# Altium PCB PCB4.PcbDoc
Units mm, origin at the board's own origin, x right, y up, seen from the top; angles counter-clockwise.
Board outline 30 x 21.75 mm, 2 copper layers (Top Layer, Bottom Layer); 20 components, 13 nets, 57 pads, 3 vias.
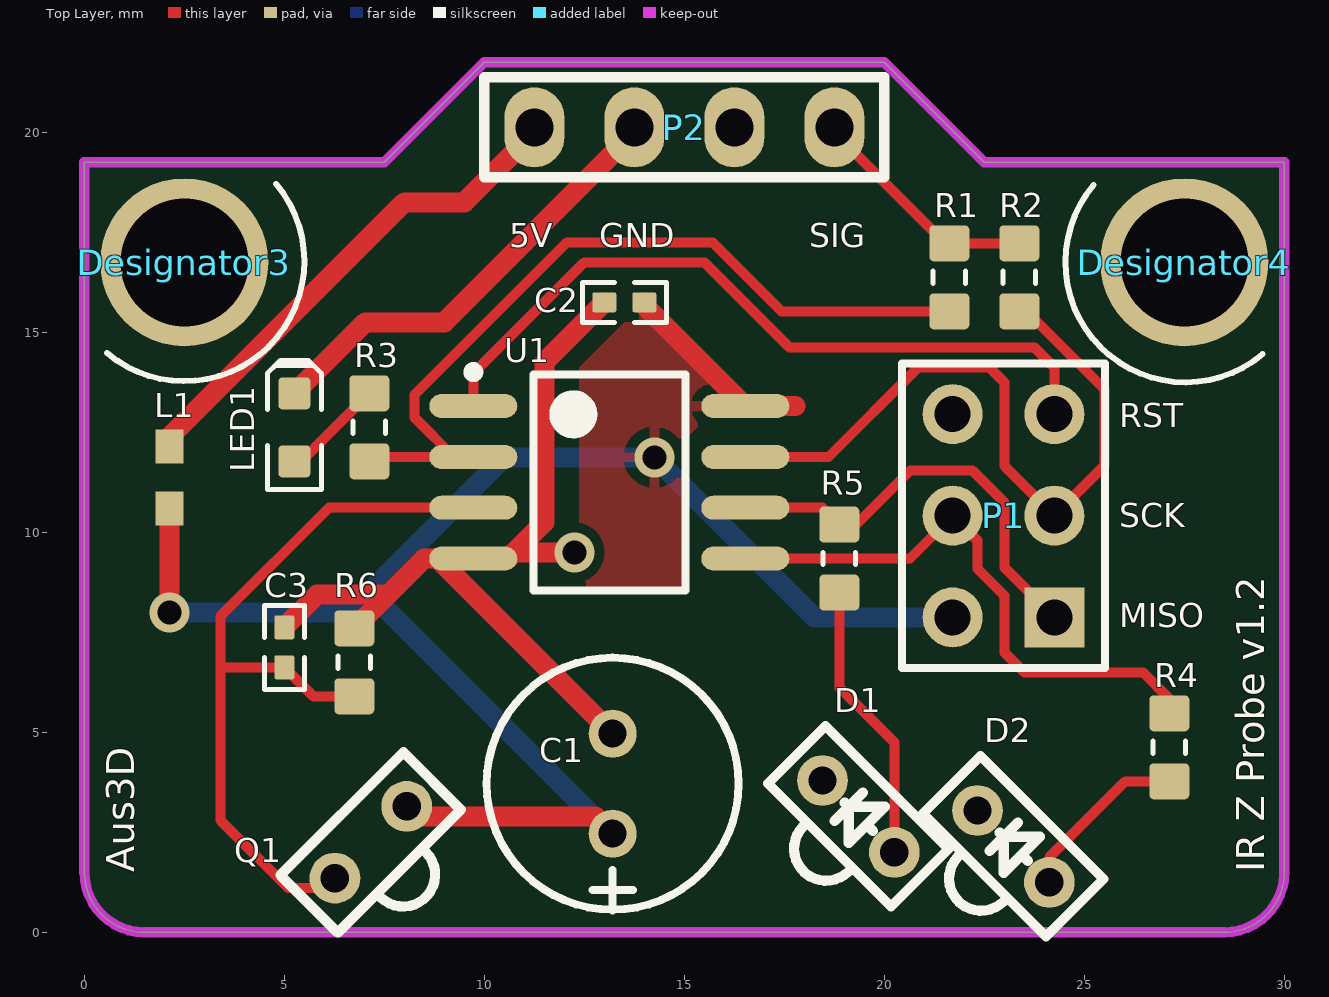
[diagram p0: Top Layer view]
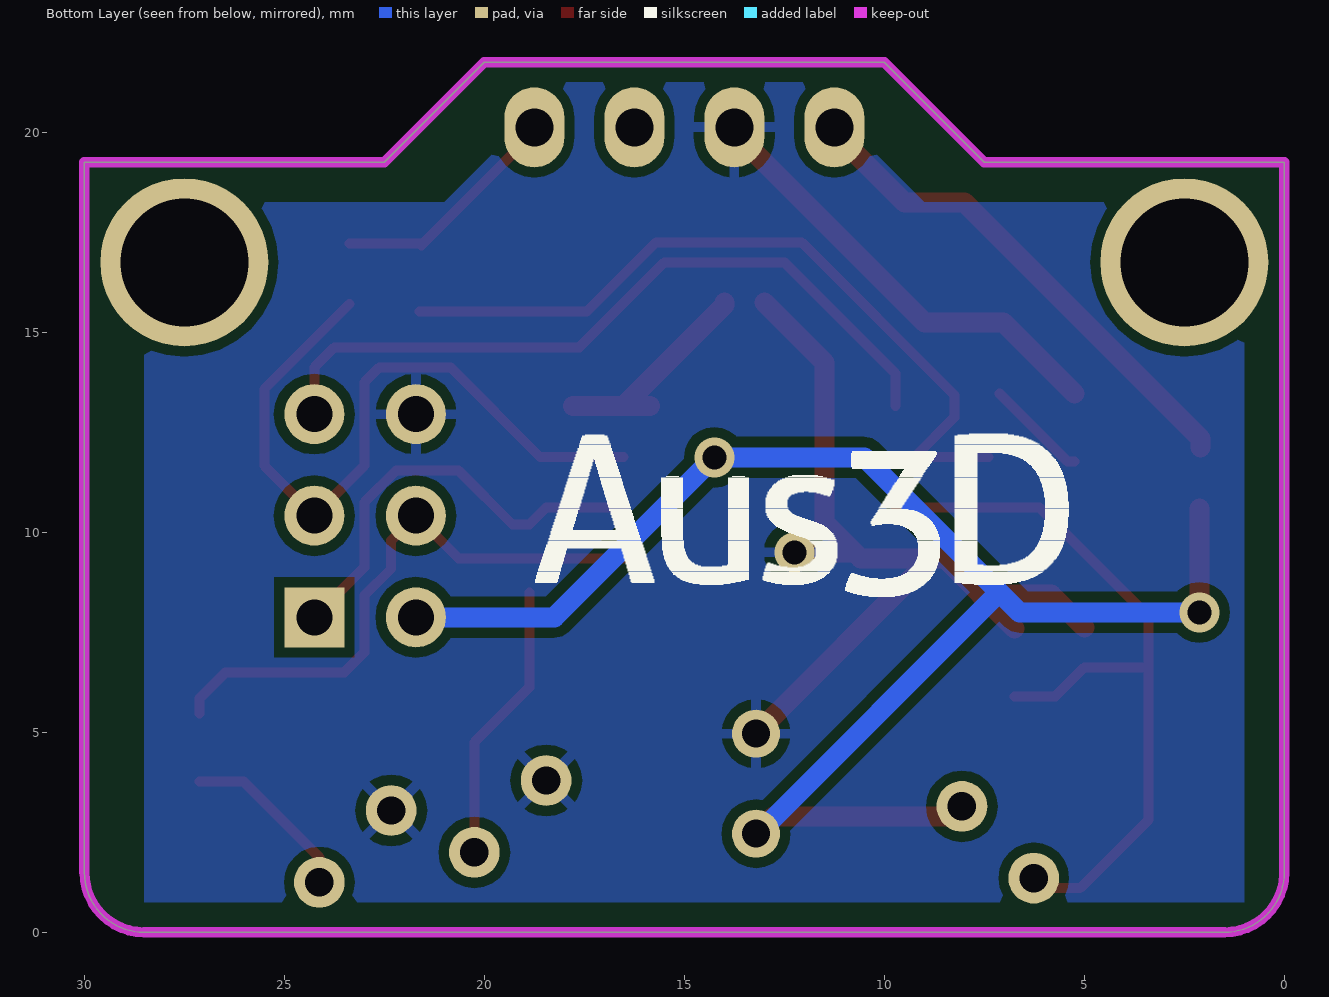
[diagram p1: Bottom Layer view, seen from below]

## Layer stack, top to bottom
Top Solder: solder mask 0.0102, Solder Resist, Dk 3.5
Top Layer: signal copper 0.0356
Dielectric1: dielectric 0.32, FR-4, Dk 4.8
Bottom Layer: signal copper 0.0356
Bottom Solder: solder mask 0.0102, Solder Resist, Dk 3.5

## Board outline
0,1.5 ccw(c1.5,1.5) 1.5,0 28.5,0 ccw(c28.5,1.5) 30,1.5 30,19.25 22.5,19.25 20,21.75 10,21.75 7.5,19.25 0,19.25

## Design rules (kind name [scope] priority, off if disabled: settings)
Clearance [All] p1: gap=0.25
FabricationTestPointUsage TestPointUsage [All] p1: valid=0 allowmultiple=FALSE
FabricationTestpoint Testpoint [All] p1: side=3 testpointundercomponent=TRUE minsize=1.016 maxsize=2.54 preferedsize=1.524 minholesize=0 maxholesize=1.016 preferedholesize=0.813 testpointgrid=0.025 allowsidetop=TRUE allowsidebottom=TRUE usegrid=TRUE gridtolerance=0
HoleSize [All] p1: absolutevalues=TRUE maxlimit=4 minlimit=0.025 maxpercent=80.000 minpercent=20.000
PolygonConnect [All] p1: connectstyle=Relief reliefconductorwidth=0.254 reliefentries=4 polygonreliefangle="90 Angle" airgapwidth=0.254
RoutingVias [All] p1: holewidth=0.6 width=1 viastyle="Through Hole" minholewidth=0.6 minwidth=1 maxholewidth=0.6 maxwidth=1
SilkToSolderMaskClearance SilkscreenOverComponentPads [IsPad] p1: minsilkscreentomaskgap=0.254 clearancetoexposedcopper=TRUE
SolderMaskExpansion [All] p1: expansion=0.102
Width Width_Power [(InNet('5V') OR InNet('GND') OR InNet('VCC'))] p1: maxlimit=0.5 minlimit=0.25 preferedwidth=0.5 minimp=50.000000 maximp=50.000000 favimp=50.000000
Width [All] p2: maxlimit=0.25 minlimit=0.2 preferedwidth=0.25 minimp=50.000000 maximp=50.000000 favimp=50.000000
26 further rules are at their usual default settings.

## Classes and differential pairs
component class board1: C1 C2 C3 D1 D2 L1 LED1 P1 P2 Q1 R1 R2 R3 R4 R5 R6 U1

## Components (designator, comment, footprint, x,y, rotation, side; value= is the part's Value field where it differs from the comment)
C1 "100µ" 6.3-DIA-CAP 13.208,4.965 r270 top
C2 "100n" CAPC1005X55N 13.5,15.75 r0 top
C3 "1n" CAPC1005X55N 5,7.125 r90 top
D1 "GL480E" LED-2.54spacing 20.25,2 r135 top
D2 "GL480E" LED-2.54spacing 24.125,1.25 r135 top
Designator3 "Comment" M3-Hole 2.5,16.75 r0 top
Designator4 "Comment" M3-Hole 27.5,16.75 r270 top
L1 "7447965" SMD-0603 2.125,11.375 r270 top
LED1 "Red" LED-0603-RED 5.25,12.625 r90 top
P1 "ICSP" HDR2X3 24.25,7.875 r90 top
P2 "Header 4" JST-4P 18.75,20.125 r180 top
Q1 "SFH3100F" SFH3100F-footprint 8.06,3.15 r225 top
R1 "Thick Film" RESC1608X55N 21.625,16.375 r270 top
R2 "Thick Film" RESC1608X55N 23.375,16.375 r270 top
R3 "Thick Film" RESC1608X55N 7.125,12.625 r90 top
R4 "Thick Film" RESC1608X55N 27.125,4.625 r90 top
R5 "Thick Film" RESC1608X55N 18.875,9.345 r90 top
R6 "Thick Film" RESC1608X55N 6.75,6.75 r270 top
U1 "ATtiny45-20SH" 8S2_N 13.125,11.25 r0 top
? "" AUS3D-LOGO-BACK 12.375,10.24 r0 top

## Footprints (in the part's own frame and the unit in brackets; to place one, negate y for a bottom-side part, rotate by r counter-clockwise, add the part's x,y. Pads: shape width x height; smd on the part's side, far side on the other; paste and mask are expansions set on the pad)
6.3-DIA-CAP [mm]
  round 1.2 hole 0.7: 1(2.5,0) 2(0,0)
  silkscreen extent -1.9,-3.15 4.42,3.15
8S2_N [mm] "SOP, 8-Leads, Body 5.3x5.3mm, Pitch 1.27mm, IPC Medium Density"
  oval 2.2x0.6 smd: 1(-3.4,1.905) 2(-3.4,0.635) 3(-3.4,-0.635) 4(-3.4,-1.905) 5(3.4,-1.905) 6(3.4,-0.635) 7(3.4,0.635) 8(3.4,1.905)
  silkscreen extent -3.52,-2.7 1.9,2.88, body extent -2.7,-2.68 2.7,2.68, height 2.16
AUS3D-LOGO-BACK [mm]
CAPC1005X55N [mm] "Chip Capacitor, Body 1.0x0.5mm, EIA 0402, IPC Medium Density"
  round 0.2 on Mech15: 0(0,0)
  rrect20% 0.6x0.5 smd: 1(-0.5,0) 2(0.5,0)
  Top Layer pour cut-out: -0.325,0.375 -0.2,0.5 0.2,0.5 0.325,0.375 0.325,-0.375 0.2,-0.5 -0.2,-0.5 -0.325,-0.375
  silkscreen extent -1.05,-0.5 1.05,0.5, body extent -0.52,-0.27 0.53,0.28, height 0.55
HDR2X3 [mm] "Connector; Header; 3x2 Position"
  rect 1.5x1.5 hole 0.9: 1(0,0)
  round 1.5 hole 0.9: 2(0,2.54) 3(2.54,0) 4(2.54,2.54) 5(5.08,0) 6(5.08,2.54)
  silkscreen extent -1.27,-1.27 6.35,3.81
JST-4P [mm]
  oval 1.5x2 hole 0.95: 1(0,0) 2(2.5,0) 3(5,0) 4(7.5,0)
  silkscreen extent -1.25,-1.25 8.75,1.25
LED-2.54spacing [mil]
  round 50 hole 28: 1(100,0) 2(0,0)
  silkscreen extent -35,-40 136,76
LED-0603-RED [mm]
  round 0.254 on Mech15: 0(0,0)
  rrect25% 0.8x0.8 smd: A(-0.85,0) K(0.85,0)
  Top Layer pour cut-out: -0.5,0.5 0.5,0.5 0.5,-0.5 -0.5,-0.5
  silkscreen extent -1.55,-0.67 1.68,0.67, body extent -0.8,-0.4 0.8,0.4, height 0.75
M3-Hole [mm]
  round 4.2 hole 3.2: M3(0,0)
  silkscreen extent -1.93,-2.97 3,1.96
RESC1608X55N [mm] "Chip Resistor, Body 1.6x0.8mm, EIA 0603, IPC Medium Density"
  round 0.254 on Mech15: 0(0,0)
  rrect25% 0.9x1 smd: 1(-0.85,0) 2(0.85,0)
  Top Layer pour cut-out: -0.6,0.5 -0.4,0.7 0.4,0.7 0.6,0.5 0.6,-0.5 0.4,-0.7 -0.4,-0.7 -0.6,-0.5
  silkscreen extent -0.15,-0.41 0.15,0.41, body extent -0.87,-0.47 0.88,0.48, height 0.54
SFH3100F-footprint [mil]
  round 50 hole 28: 1(0,0) 2(100,0)
  silkscreen extent -35,-40 136,76
SMD-0603 [mm] "Chip Inductor, 2-Leads, Body 1.6x0.8mm"
  rect 0.85x0.7 smd: 1(-0.775,0) 2(0.775,0)
  body extent -0.8,-0.4 0.8,0.4, height 0.95

## Part data
C1: library part CAPE_100u_16V_THD, "Capacitor THD Electrolytic 100uF 20% 16V Radial"
C2: library part CAPC_100n_0402_X5R_16V_10%, "Capacitor SMD Cer 100nF 10% 16V X5R 0402"
C3: library part CAPC_1n_0402_X7R_16V_10%, "Capacitor SMD Cer 1nF 10% 16V X7R 0402"
L1: "SMD-Multilayer Inductor WE-MI, L = 1.00 µH"
LED1: library part LED_SMD_Red_0603_220mcd, "LED 0603 SMD Hyper Red 630nm 220mcd 20mA"
P1: library part "Header 3X2", "Header, 3-Pin, Dual row"
P2: "Header, 4-Pin"
Q1: "GL480E"
R1 R2 R4 R5 R6: library part RES_2K2_0603_5%, "Resistor SMD chip 2.2k Ohm 0.1W 5% 0603"
R3: library part RES_330R_0603_5%, "Resistor SMD chip 330 Ohm 0.1W 5% 0603"
U1: "8-bit AVR Microcontroller, 20MHz, 2.7-5.5V, 4K Flash, 256 Bytes EEPROM, 256 Bytes SRAM, Industrial Grade (-40°C to 85°C), 8-Lead SOIC, Pb-Free"

## Via types
v1: diameter 1, hole 0.6, Top Layer to Bottom Layer, tented both sides, 3 vias

## Nets (pads, with @x,y where several pads share a name; then routed paths per layer and width w, separated by ;. In a path a pad name is that pad's centre, name@x,y a point inside that pad or via, vN(x,y) a via of type N, cw(c..) or ccw(c..) an arc to the next point about the centre after c; other vN are vias at no path point)
5V: C1.1 C2.2 L1.2 P1.2 Q1.1 U1.8 | length 44.7
  Top Layer w0.5: v1(2.125,8) L1.2 ; Q1.1@8.306,2.898 12.775,2.898 C1.1 ; C2.2 14,15.68 U1.8 ; U1.8@15.864,13.155 U1.8 ; 17.78,13.155 U1.8 ; P1.2 P1.2@21.75,7.835
  Bottom Layer w0.5: v1(2.125,8) 6.625,8 7.125,8.5 ; C1.1 13.16,2.465 7.125,8.5 ; P1.2 18.25,7.875 v1(14.25,11.875) 10.5,11.875 7.125,8.5
GND: C1.2 C2.1 C3.2 D1.1 D2.1 LED1.K P1.6 P2.3 R6.1 U1.4 | length 33.8
  Top Layer w0.5: C3.2 5.823,8.448 7.598,8.448 ; LED1.K 7.025,15.25 9,15.25 P2.3@13.75,20 ; R6.1 8.495,9.345 U1.4 10.595,9.345 U1.4@10.75,9.5 ; U1.4@8.836,9.336 C1.2 ; v1(12.25,9.5) U1.4@10.75,9.5 ; C2.1 11.5,14.25 11.5,10.25 U1.4@10.75,9.5
NetC3_1: C3.1 Q1.2 R6.2 U1.3 | length 20
  Top Layer w0.25: Q1.2@6.51,1.102 5.102,1.102 3.4,2.804 3.4,6.625 ; R6.2 5.725,5.9 C3.1 3.4,6.625 ; U1.3 6.115,10.615 3.4,7.9 3.4,6.625
NetD1_2: D1.2 R5.1 | length 7.1
  Top Layer w0.25: R5.1 18.875,6.125 20.25,4.75 D1.2
NetD2_2: D2.2 R4.1 | length 4.4
  Top Layer w0.25: D2.2 24.125,1.875 26.025,3.775 R4.1
NetLED1_A: LED1.A R3.2 | length 2.6
  Top Layer w0.25: LED1.A 5.425,11.775 R3.2
NetP1_1: P1.1 R5.2 U1.6 | length 10.9
  Top Layer w0.25: U1.6 18.455,10.615 R5.2 19.297,10.195 20.642,11.54 22.21,11.54 23,10.75 23,9.125 P1.1
NetP1_3: P1.3 R2.2 U1.7 | length 18.1
  Top Layer w0.25: U1.7 18.606,11.885 20.846,14.125 22.625,14.125 23,13.75 23,11.665 P1.3 25.5,11.665 25.5,13.582 R2.2@23.375,15.707
NetP1_4: P1.4 R4.2 U1.5 | length 14.5
  Top Layer w0.25: U1.5 20.64,9.345 P1.4 22.335,9.79 22.335,9.083 23,8.418 23,7 23.5,6.5 26.465,6.5 27.125,5.84 R4.2
NetP1_5: P1.5 U1.1 | length 18.8
  Top Layer w0.25: U1.1 9.725,13.975 12.5,16.75 15.5,16.75 17.625,14.625 23.75,14.625 24.25,14.125 P1.5
NetR1_2: R1.2 R3.1 U1.2 | length 20
  Top Layer w0.25: R3.1@7.39,11.885 U1.2@9.24,11.885 ; U1.2 U1.2@9.24,11.885 ; R1.2 17.432,15.525 15.707,17.25 12.065,17.25 8.25,13.435 8.25,12.875 U1.2@9.24,11.885
SIG: P2.1 R1.1 R2.1 | length 5.7
  Top Layer w0.25: P2.1@18.75,20 R1.1@21.575,17.175 ; R1.1 R2.1
VCC: L1.1 P2.4 | length 12.5
  Top Layer w0.5: L1.1@2.1,12.125 2.1,12.35 8,18.25 9.5,18.25 P2.4@11.25,20
pads on no net: C2.0 C3.0 Designator3.M3 Designator4.M3 LED1.0 P2.2 R1.0 R2.0 R3.0 R4.0 R5.0 R6.0

## Polygon pours and split planes (outlines as drawn)
GND on Bottom Layer "GND - BottomLayer" (solid, pour order 2): 1,18.25 1,0.75 28.5,0.75 28.5,18.25 21,18.25 19,20.25 19,21.25 11,21.25 11,20.25 9,18.25
5V on Top Layer "VCC - TopLayer" (solid, remove dead copper, pour order 4): 14,15.75 12.375,14.125 12.375,10.625 12.375,8.625 15,8.625 15,12.291 15.864,13.155 15.875,13.166 15.875,14 15.875,14.125 14.125,15.875

## Keep-outs
Keep-Out Layer:
  the board outline again, w0.254

## Silkscreen, mask and mechanical layers (free items; w line width, h text height)
Top Overlay:
  text "5V" at 10.625,17.125 h0.6
  text "GND" at 12.875,17.125 h0.6
  text "SIG" at 18.125,17.125 h0.6
  text "RST" at 25.875,12.625 h0.6
  text "SCK" at 25.875,10.125 h0.6
  text "MISO" at 25.875,7.625 h0.6
  text "Aus3D" at 1.25,1.5 h0.7 r90
  text "IR Z Probe v1.2" at 29.5,1.5 h0.7 r90
Mechanical 16:
  drawing of 1874 lines, arcs and shapes, not listed
  text "1" at -98.129,98.861 h0.6
  text "2" at -25.485,98.861 h0.6
  text "3" at 47.667,98.861 h0.6
  text "4" at 120.565,98.861 h0.6
  text "A" at -132.47,75.849 h0.6
  text "A" at 154.55,75.849 h0.6
  text "B" at -132.47,27.792 h0.6
  text "B" at 154.55,27.792 h0.6
  text "C" at -132.47,-20.722 h0.6
  text "C" at 154.55,-20.722 h0.6
  text "ENGINEER:" at 39.615,-57.73 h0.6
  text "TITLE:" at 77.715,-57.73 h0.6
  text "PCB DESIGNER:" at 39.615,-65.223 h0.6
  text "D" at -132.47,-68.728 h0.6
  text "D" at 154.55,-68.728 h0.6
  text "DATE:" at 39.615,-72.97 h0.6
  text "PART NO.:" at 77.715,-72.97 h0.6
  text "REV:" at 131.055,-72.97 h0.6
  text "Altium Limited" at 6.595,-75.51 h0.6
  text ".PRINT_DATE" at 40.885,-76.018 h0.6
  text "12a Rodborough Rd" at 6.595,-78.05 h0.6
  text "Frenchs Forest" at 6.595,-80.59 h0.6
  text "FILE NAME:" at 39.615,-80.59 h0.6
  text "DWG NO:" at 77.715,-80.59 h0.6
  text "SCALE:" at 131.055,-80.59 h0.6
  text "NSW 2086" at 6.595,-83.13 h0.6
  text ".PCB_FILE_NAME_NO_PATH" at 40.885,-83.638 h0.6
  text "1" at -98.129,-89.099 h0.6
  text "2" at -25.485,-89.099 h0.6
  text "3" at 47.667,-89.099 h0.6
  text "4" at 120.565,-89.099 h0.6